# EAGLE board Aircopter (EAGLE 9.2.2)

Size 28 x 47 mm. Coordinates in mm from the lower left corner, seen from the top.
Outline: 0,0 0,1 2,1 2,4 0,4 0,43 2,43 2,46 0,46 0,47 28,47 28,46 26,46 26,43 28,43 28,4 26,4 26,1 28,1 28,0 0,0
Copper layers (1*16): Top 0.035mm / dielectric 1.5mm / Bottom 0.035mm
Design rules "default": minimum track width 6mil, minimum drill 0.35mm, track to track 6mil, track to pad 6mil, pad to pad 6mil, via to via 6mil, smd to smd 6mil, copper to edge 40mil, drill to drill 6mil, minimum pad ring 10mil, minimum via ring 8mil, stop-mask expansion 4mil, vias tented up to drill 0mil, thermal gap 10mil

## Footprints (pad centres in the part's own frame; a part is rotated, then mirrored left to right if it is on the bottom)
QFN32_5X5MM = smd 0.6 x 0.3: 1 -2.35,1.75; 2 -2.35,1.242; 3 -2.35,0.75; 4 -2.35,0.25; 5 -2.35,-0.25; 6 -2.35,-0.75; 7 -2.35,-1.25; 8 -2.35,-1.75; 17 2.35,-1.75; 18 2.35,-1.25; 19 2.35,-0.75; 20 2.35,-0.25; 21 2.35,0.25; 22 2.35,0.75; 23 2.35,1.25; 24 2.35,1.75 | smd 0.3 x 0.6: 9 -1.75,-2.35; 10 -1.25,-2.35; 11 -0.75,-2.35; 12 -0.25,-2.35; 13 0.25,-2.35; 14 0.75,-2.35; 15 1.25,-2.35; 16 1.75,-2.35; 25 1.75,2.35; 26 1.25,2.35; 27 0.75,2.35; 28 0.25,2.35; 29 -0.25,2.35; 30 -0.75,2.35; 31 -1.25,2.35; 32 -1.75,2.35 | smd 3.45 x 3.45: EPAD 0,0
VFLGA4 = smd 0.43 x 0.5: 1 0.04,-0.762 | smd 0.35 x 0.5: 2 1.2,-0.75; 3 1.2,0; 4 0,0
VSON10 = smd 0.6 x 0.24: 1 -1.4,1; 2 -1.4,0.5; 3 -1.4,0; 4 -1.4,-0.5; 5 -1.4,-1; 6 1.4,-1; 7 1.4,-0.5; 8 1.4,0; 9 1.4,0.5; 10 1.4,1 | smd 1.65 x 2.4: EPAD -0.003,-0.008 | drill 0.2 pad 0.254: EPAD-1 0,-1.016; EPAD-2 0,1.016; EPAD-3 0.635,0; EPAD-4 -0.635,0
C0603K = smd 1.05 x 1.08: 1 -0.875,0; 2 0.875,0
C1206K = smd 1.5 x 2: 1 -1.5,0; 2 1.5,0
FTDI_DEVICE_SIDE = drill 1.016 pad 1.88 square: P$1 -6.35,0 | drill 1.016 pad 1.88: P$2 -3.81,0; P$3 -1.27,0; P$4 1.27,0; P$5 3.81,0; P$6 6.35,0
WIRELESS-NRF24L01 = drill 1 square: 1 -12.7,6.35 | drill 1: 2 -10.16,6.35; 3 -12.7,3.81; 4 -10.16,3.81; 5 -12.7,1.27; 6 -10.16,1.27; 7 -12.7,-1.27; 8 -10.16,-1.27
JST-PH2 = drill 0.813 pad 1.676 octagon: 1 1,0; 2 -1,0
R0603 = smd 1 x 1.1: 1 -0.85,0; 2 0.85,0
TACTILE-SWITCH-SMD = smd 1.524 x 0.762: 1 -2.794,1.905; 2 2.794,1.905; 3 -2.794,-1.905; 4 2.794,-1.905
MA04-1 = drill 1.016 long: 1 -3.81,0; 2 -1.27,0; 3 1.27,0; 4 3.81,0
GY-521 = drill 0.8 pad 1.778 long: ADO -8.89,-6.35; GND -8.89,6.35; INT -8.89,-8.89; SCL -8.89,3.81; SDA -8.89,1.27; VCC -8.89,8.89; XCL -8.89,-3.81; XDA -8.89,-1.27
MINI2-F3-B = smd 1.22 x 0.85: NEG 0,1.55; POS 0,-1.5
SOT23-3 = smd 0.8 x 0.9: 1 -0.95,-1; 2 0.95,-1; 3 0,1.1
L-0603 = smd 0.6 x 0.8: P$1 -0.7,0; P$2 0.7,0

## Placement (x,y rotation side)
*1  STM32L432KCU6  [QFN32_5X5MM]  13.25,28.76 0 top
*2  DSC6001CI1A-008.0000T  [VFLGA4]  6.65,27.39 0 top
*4  TPS63001DRCRTPS63001DRCR_VSON10  [VSON10]  18.61,17.3 270 top
C1  100n  [C0603K]  7.14,25.17 0 top
C2  10p\  [C0603K]  9.4,27.03 270 top
C3  100n  [C0603K]  16.26,25.88 45 top
C4  100n  [C0603K]  10.06,33.53 45 top
C5  4.7u  [C0603K]  10.67,32.16 45 top
C6  10n  [C0603K]  7.14,30.18 90 top
C7  100n  [C0603K]  5.84,30.18 90 top
C8  1u  [C0603K]  8.48,30.18 90 top
C9  100n  [C0603K]  16.28,16.69 90 top
C10  100n  [C0603K]  6.38,2.95 270 top
C11  10u  [C0603K]  18.44,14.35 180 top
C12  10u  [C0603K]  18.44,13.11 180 top
C13  10u  [C0603K]  4.88,2.9 270 top
C14  100u  [C1206K]  22.15,16.87 270 top
C15  100n  [C0603K]  4.19,15.75 0 top
C17  10u  [C0603K]  14.99,18.31 270 top
J1  FTDI_DEVICE  [FTDI_DEVICE_SIDE]  25.94,28.37 90 top
M1  WIRELESS-NRF24L01  [WIRELESS-NRF24L01]  14.96,14.77 90 top
P1  [JST-PH2]  2.1,38.8 270 top
P2  [JST-PH2]  25.96,16.73 90 top
P3  [JST-PH2]  25.91,39.15 90 top
P4  [JST-PH2]  1.96,8.13 270 top
P5  [JST-PH2]  26.01,8.43 90 top
R1  10k  [R0603]  14,15.77 0 top
R2  10k  [R0603]  19.38,37.57 180 top
R3  10k  [R0603]  8.61,40.28 0 top
R4  10k  [R0603]  8.79,10.21 0 top
R5  10k  [R0603]  19.56,7.34 180 top
R6  10k  [R0603]  4.17,14.4 0 top
R7  10k  [R0603]  14.33,20.95 45 top
R8  10k  [R0603]  17.07,20.78 45 top
S1  [TACTILE-SWITCH-SMD]  3.46,20.46 90 top
SV1  [MA04-1]  2.71,29.66 90 top
U1  GY-521MPU6050  [GY-521]  14.31,35.1 270 top
U$1  1N4001  [MINI2-F3-B]  22.07,39.34 180 top
U$2  IRLML6244TRPBF  [SOT23-3]  8.56,37.97 180 top
U$3  1N4001  [MINI2-F3-B]  5.96,38.67 0 top
U$4  IRLML6244TRPBF  [SOT23-3]  8.86,8.01 180 top
U$5  IRLML6244TRPBF  [SOT23-3]  19.41,40.16 0 top
U$6  1N4001  [MINI2-F3-B]  5.94,8.37 0 top
U$7  IRLML6244TRPBF  [SOT23-3]  19.5,9.58 0 top
U$8  1N4001  [MINI2-F3-B]  22.13,8.31 180 top
U$9  1.5u  [L-0603]  18.71,19.7 180 top

## Library data of the parts
*1 = Aircopter; DESCRIPTION: 16/32-BITS MICROS; LEAD_FREE: Lead Free; MANUFACTURER: STMicroelectronics; MANUFACTURER_PART_NUMBER: STM32L432KCU6; NUMBER_OF_PINS: 32; STOCK_1: 6394; SUPPLIER_1: Mouser; SUPPLIER_PART_NUMBER_1: 511-STM32L432KCU6
*2 = Aircopter; MANUFACTURER: Microchip; MANUFACTURER_PART_NUMBER: DSC6001CI1A-008.0000T; STOCK_1: 1311; SUPPLIER_1: Digi-Key; SUPPLIER_PART_NUMBER_1: DSC6001CI1A-008.0000TDKR-ND
*4 = Aircopter; COMPONENTLINK1DESCRIPTION: http://www.ti.com/lit/ds/symlink/tps63001.pdf; COMPONENTLINK1URL: http://www.ti.com/lit/ds/symlink/tps63001.pdf; COMPONENTLINK2DESCRIPTION: http://www.farnell.com/datasheets/1854797.pdf; COMPONENTLINK2URL: http://www.farnell.com/datasheets/1854797.pdf; COMPONENTLINK4DESCRIPTION: http://focus.ti.com/lit/ds/symlink/tps63001.pdf; COMPONENTLINK4URL: http://focus.ti.com/lit/ds/symlink/tps63001.pdf; COMPONENTLINK7DESCRIPTION: http://www.farnell.com/datasheets/2018926.pdf; COMPONENTLINK7URL: http://www.farnell.com/datasheets/2018926.pdf; COMPONENTLINK8DESCRIPTION: http://datasheet.iiic.cc/texas_instruments/TPS63001DRCR.pdf; COMPONENTLINK8URL: http://datasheet.iiic.cc/texas_instruments/TPS63001DRCR.pdf; COMPONENTLINK9DESCRIPTION: http://www.produktinfo.conrad.com/datenblaetter/1000000-1099999/001014938-da-01-en-IC_REG_BUCK_BST_TPS63001DRCR_VSON_10_TID.pdf; COMPONENTLINK9URL: http://www.produktinfo.conrad.com/datenblaetter/1000000-1099999/001014938-da-01-en-IC_REG_BUCK_BST_TPS63001DRCR_VSON_10_TID.pdf; CONTACT_PLATING: Gold; DESCRIPTION: IC REG BUCK BST 3.3V 1.6A 10SON; EFFICIENCY: 96%; LEAD_FREE: Lead Free; MANUFACTURER: Texas Instruments; MANUFACTURER_PART_NUMBER: TPS63001DRCR; MAX_INPUT_VOLTAGE: 5.5V; MAX_OPERATING_TEMPERATURE: 85�C; MAX_OUTPUT_CURRENT: 1.2A; MAX_OUTPUT_VOLTAGE: 3.3V; MIN_INPUT_VOLTAGE: 1.8V; MIN_OPERATING_TEMPERATURE: -40�C; MIN_OUTPUT_VOLTAGE: 3.3V; NOMINAL_OUTPUT_VOLTAGE: 3.3V; NUMBER_OF_OUTPUTS: 1; NUMBER_OF_PINS: 10; OPERATING_SUPPLY_VOLTAGE: 5.5V; OUTPUT_CURRENT: 1.2A; OUTPUT_TYPE: Fixed; OUTPUT_VOLTAGE: 3.3V; PACKAGE_QUANTITY: 1; PACKAGING: Tape and Reel; QUIESCENT_CURRENT: 30uA; RADIATION_HARDENING: No; REACH_SVHC: No SVHC; STOCK_1: 260; SUPPLIER_1: Digi-Key; SUPPLIER_PART_NUMBER_1: 296-19643-6-ND; SWITCHING_FREQUENCY: 1.5MHz; SYNCHRONOUS_RECTIFIER: Yes; TOPOLOGY: Buck-Boost; WEIGHT: 0.000921oz
C1-C8 C10 C13 C15 = rcl; SPICEPREFIX: C
C9 C11 C12 C14 C17 R2-R6 = resistor
J1 M1 U1 U$1 U$3 U$6 U$8 = AP_quad
P1-P5 = jst-ph
R1 R7 R8 = rcl; SPICEPREFIX: R
S1 = AP_quad; PROD_ID: SWCH-08247
SV1 = con-lstb; OC_FARNELL: unknown; OC_NEWARK: unknown
U$2 U$4 U$5 U$7 = AP_quad; DATASHEET: http://www.mouser.com/ds/2/196/irlml6244pbf-936666.pdf; MOUSER: 942-IRLML6244TRPBF; URL: http://www.mouser.com/Search/ProductDetail.aspx?R=IRLML6244TRPBFvirtualkey57370000virtualkey942-IRLML6244TRPBF
U$9 = Aircopter

## Nets
+3V3: *1.1 *1.5 *1.17 *2.1 *2.4 *4.1 *4.10 C1.1 C3.1 C4.1 C5.1 C6.1 C7.1 C8.1 C10.1 C11.1 C12.1 C13.1 J1.P$4 M1.2 R6.2 U1.VCC
BATSENSE: *1.15 R7.2 R8.1
CTS: *1.21 J1.P$5
GND: *1.16 *1.32 *1.EPAD *2.2 *4.3 *4.9 *4.EPAD C1.2 C2.2 C6.2 C7.2 C8.2 C9.2 C10.2 C11.2 C12.2 C13.2 C14.2 C15.2 C17.2 J1.P$6 M1.1 P2.2 R2.1 R3.1 R4.1 R5.1 R8.2 S1.3 SV1.3 U1.ADO U1.GND U$2.2 U$4.2 U$5.2 U$7.2
MISO: *1.12 M1.7
MOSI: *1.13 M1.6
MOTOR1: *1.18 R2.2 U$5.1
MOTOR2: *1.7 R3.2 U$2.1
MOTOR3: *1.8 R4.2 U$4.1
MOTOR4: *1.9 R5.2 U$7.1
N$1: P3.1 U$1.POS U$5.3
N$2: *4.4 U$9.P$2
N$3: P1.1 U$2.3 U$3.POS
N$4: *4.2 U$9.P$1
N$5: *4.6 *4.7 *4.8 C9.1 R1.2
N$6: P4.1 U$4.3 U$6.POS
N$7: P5.1 U$7.3 U$8.POS
N$12: C3.2 C4.2 C5.2
NRST: *1.4 C15.1 R6.1 S1.1 SV1.1
NSS: *1.10 M1.4
OSC: *1.6 *2.3 C2.1
RADIO_CE: *1.14 M1.3
RTS: *1.22 J1.P$1
RX: *1.20 J1.P$3
SCK: *1.11 M1.5
SCL: *1.29 U1.SCL
SDA: *1.30 U1.SDA
SWCLK: *1.24 SV1.4
SWDIO: *1.23 SV1.2
TX: *1.19 J1.P$2
V+: *4.5 C14.1 C17.1 P1.2 P2.1 P3.2 P4.2 P5.2 R1.1 R7.1 U$1.NEG U$3.NEG U$6.NEG U$8.NEG

## Tracks (layer width: path | path; a pad name or v marks a point on that pad's centre or on a via)
+3V3  (21 unrouted)
BATSENSE  (2 unrouted)
CTS  (1 unrouted)
GND  (35 unrouted)
MISO  (1 unrouted)
MOSI  (1 unrouted)
MOTOR1  (2 unrouted)
MOTOR2  (2 unrouted)
MOTOR3  (2 unrouted)
MOTOR4  (2 unrouted)
N$1  (2 unrouted)
N$2  (1 unrouted)
N$3  (2 unrouted)
N$4  (1 unrouted)
N$5  (4 unrouted)
N$6  (2 unrouted)
N$7  (2 unrouted)
N$12  (2 unrouted)
NRST  (4 unrouted)
NSS  (1 unrouted)
OSC  (2 unrouted)
RADIO_CE  (1 unrouted)
RTS  (1 unrouted)
RX  (1 unrouted)
SCK  (1 unrouted)
SCL  (1 unrouted)
SDA  (1 unrouted)
SWCLK  (1 unrouted)
SWDIO  (1 unrouted)
TX  (1 unrouted)
V+  (13 unrouted)